# Altium PCB PCB.PcbDoc
Units mm, origin at the board's own origin, x right, y up, seen from the top; angles counter-clockwise.
Board outline 80 x 44.44 mm, 2 copper layers (Top Layer, Bottom Layer); 3 components, 28 nets, 117 pads, 0 vias.
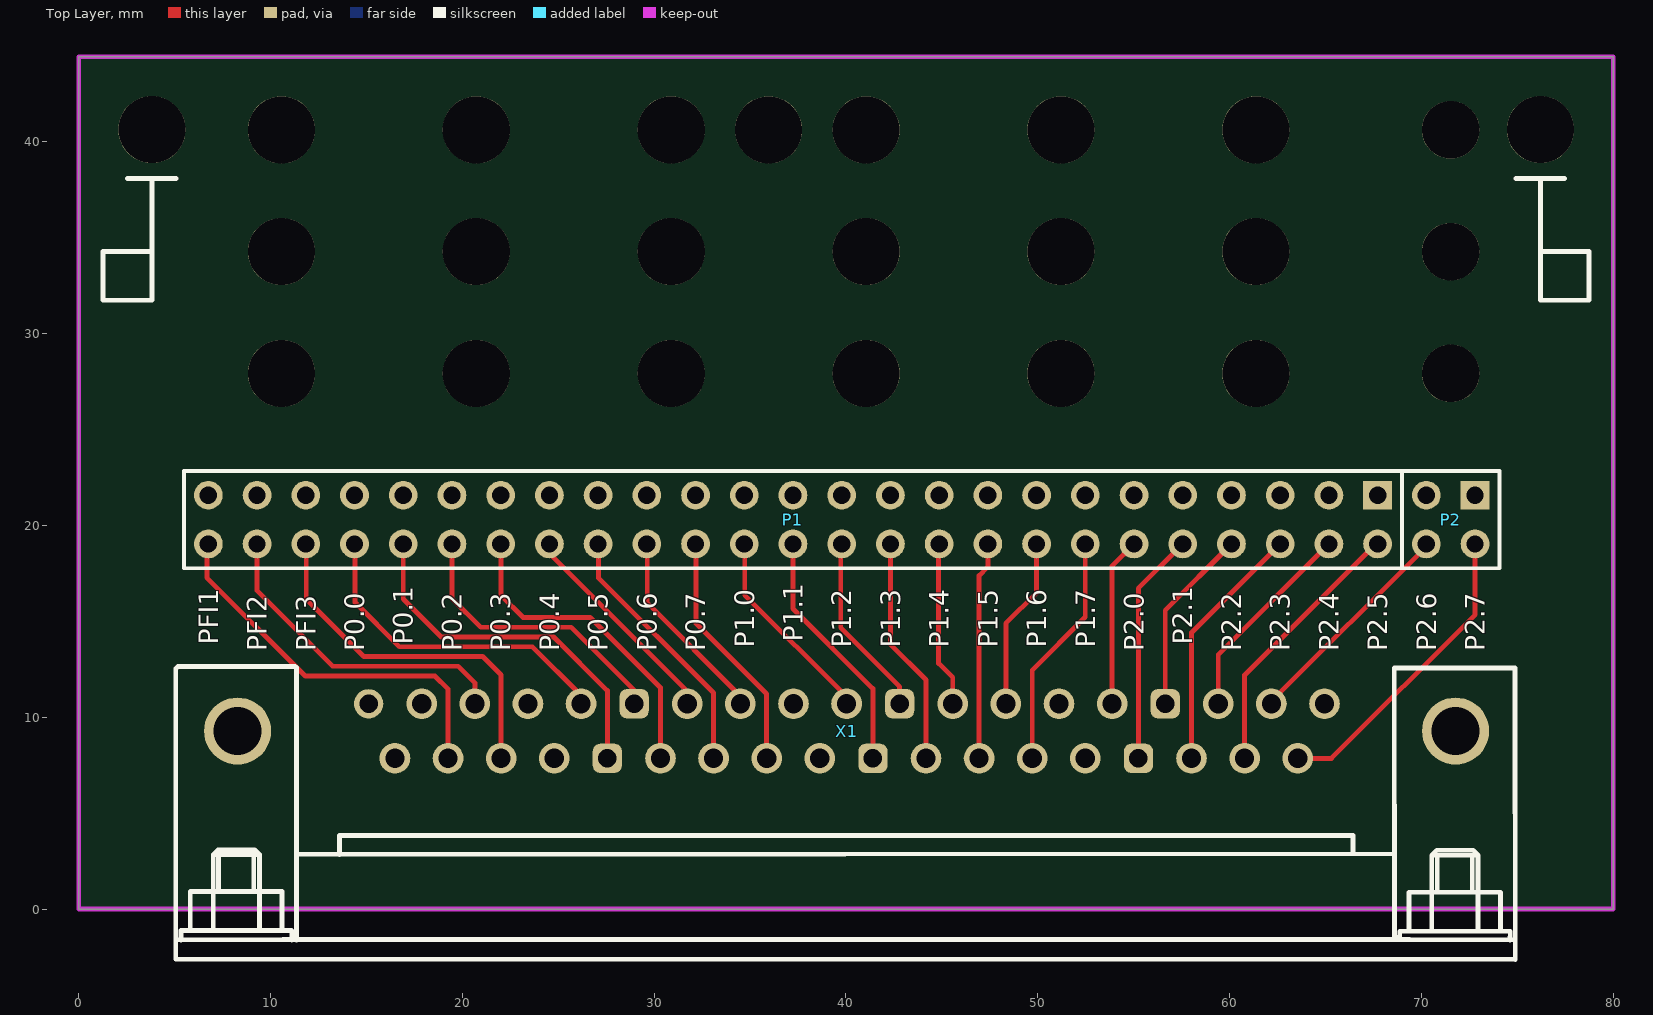
[diagram p0: Top Layer view]
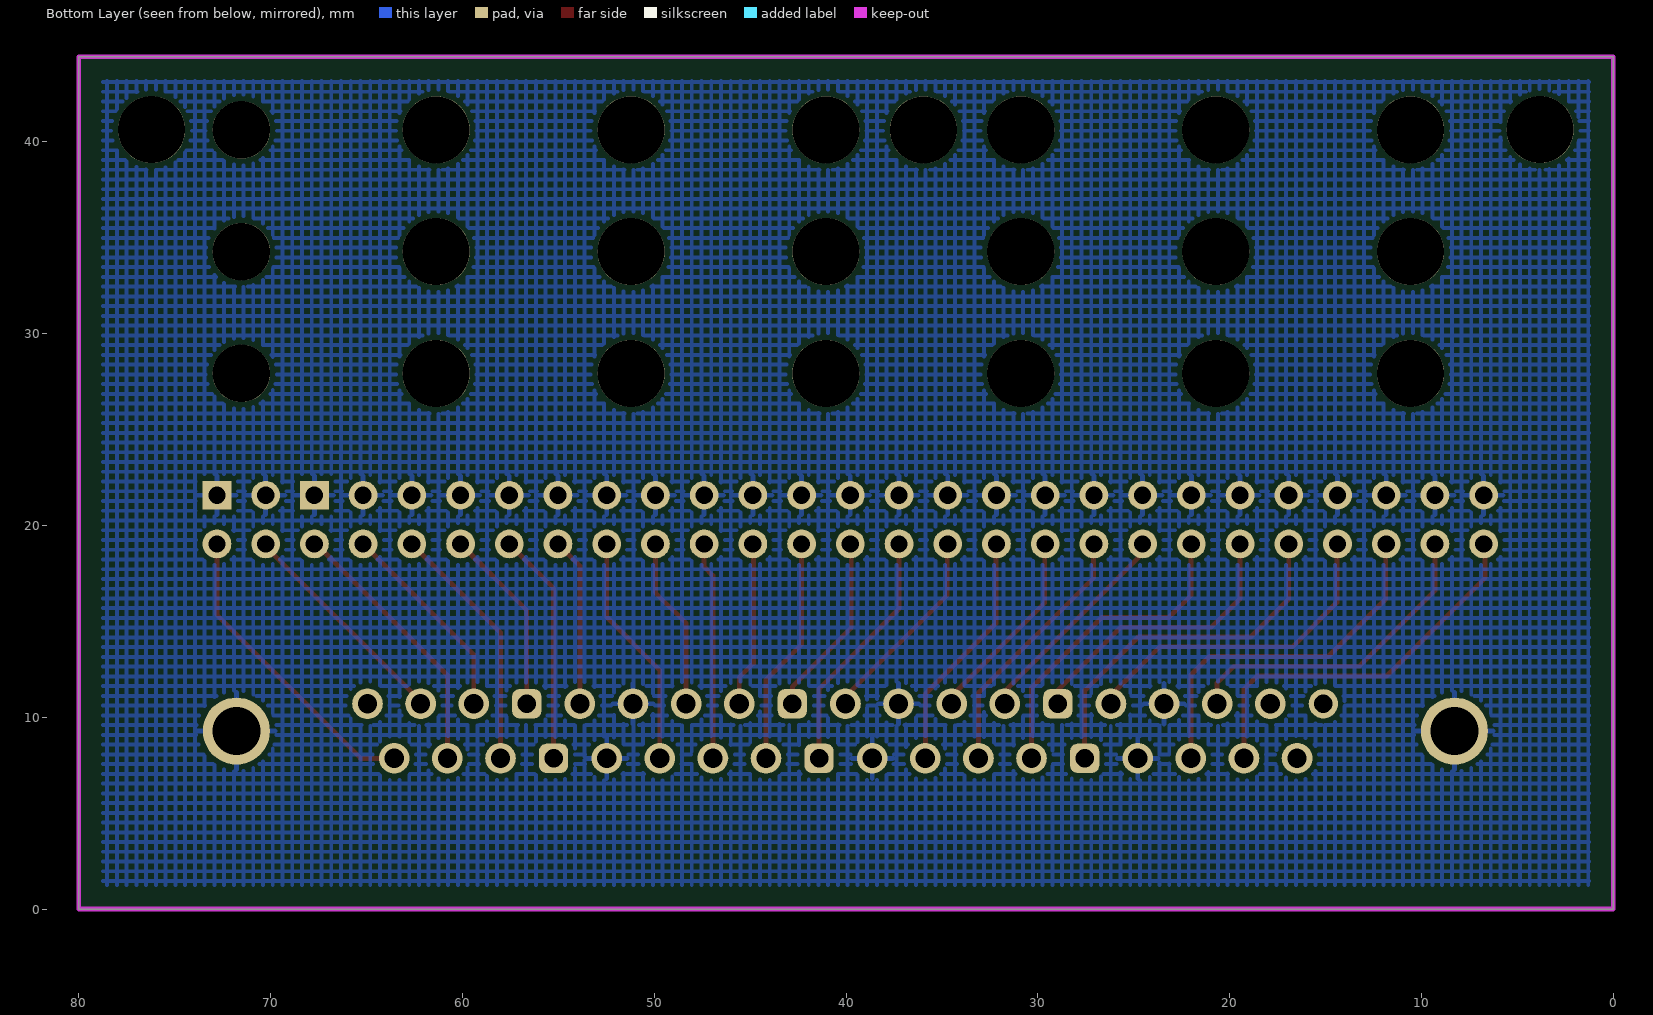
[diagram p1: Bottom Layer view, seen from below]

## Layer stack, top to bottom
Top Solder: solder mask 0.0102, Solder Resist, Dk 3.5
Top Layer: signal copper 0.0356
Dielectric 1: dielectric 0.32, FR-4, Dk 4.8
Bottom Layer: signal copper 0.0356
Bottom Solder: solder mask 0.0102, Solder Resist, Dk 3.5

## Board outline
0,0 80,0 80,44.441 0,44.441

## Design rules (kind name [scope] priority, off if disabled: settings)
Clearance [All] p1: gap=0.254
PolygonConnect [All] p1: connectstyle=Relief reliefconductorwidth=0.254 reliefentries=4 polygonreliefangle="90 Angle" airgapwidth=0.254
RoutingVias [All] p1: holewidth=0.711 width=1.27 viastyle="Through Hole" minholewidth=0.711 minwidth=1.27 maxholewidth=0.711 maxwidth=1.27
SolderMaskExpansion [All] p1: expansion=0.102
Width [All] p1: maxlimit=0.254 minlimit=0.254 preferedwidth=0.254
29 further rules are at their usual default settings.

## Components (designator, comment, footprint, x,y, rotation, side; value= is the part's Value field where it differs from the comment)
P1 "Header 25X2" HDR2X25 67.716,21.581 r180 top
P2 "Header 2X2" HDR2X2 72.796,21.581 r180 top
X1 "CHEAP_CON_37_FEMALE" CHEAP_CONN_FEMALE 71.78,9.287 r180 top

## Footprints (in the part's own frame and the unit in brackets; to place one, negate y for a bottom-side part, rotate by r counter-clockwise, add the part's x,y. Pads: shape width x height; smd on the part's side, far side on the other; paste and mask are expansions set on the pad)
CHEAP_CONN_FEMALE [mm] "CHEAP_CONN_FEMALE"
  round 1.6 hole 1: 1(6.833,-1.422) 2(9.601,-1.422) 3(12.37,-1.422) 5(17.907,-1.422) 6(20.676,-1.422) 7(23.444,-1.422) 8(26.213,-1.422) 10(31.75,-1.422) 11(34.519,-1.422) 12(37.287,-1.422) 13(40.056,-1.422) 15(45.593,-1.422) 16(48.362,-1.422) 17(51.13,-1.422) 18(53.899,-1.422) 20(8.23,1.422) 21(10.998,1.422) 22(13.767,1.422) 24(19.304,1.422) 25(22.073,1.422) 26(24.841,1.422) 27(27.61,1.422) 29(33.147,1.422) 30(35.916,1.422) 31(38.684,1.422) 32(41.453,1.422) 34(46.99,1.422) 35(49.759,1.422) 36(52.527,1.422) 37(55.296,1.422)
  rrect50% 1.524x1.524 hole 0.965: 4(15.138,-1.422) 9(28.981,-1.422) 14(42.824,-1.422) 23(16.535,1.422) 28(30.378,1.422) 33(44.221,1.422)
  round 1.524 hole 0.965: 19(56.667,-1.422)
  round 3.5 hole 2.5: 38(0,0) 39(63.5,0)
  silkscreen extent -3.11,-3.36 66.72,11.92
HDR2X2 [mm] "Connector; Header; 2x2 Position"
  rect 1.5x1.5 hole 0.9: 1(0,0)
  round 1.5 hole 0.9: 2(0,2.54) 3(2.54,0) 4(2.54,2.54)
  silkscreen extent -1.27,-1.27 3.81,3.81
HDR2X25 [mm] "Connector; Header; 25x2 Position"
  rect 1.5x1.5 hole 0.9: 1(0,0)
  round 1.5 hole 0.9: 2(0,2.54) 3(2.54,0) 4(2.54,2.54) 5(5.08,0) 6(5.08,2.54) 7(7.62,0) 8(7.62,2.54) 9(10.16,0) 10(10.16,2.54) 11(12.7,0) 12(12.7,2.54) 13(15.24,0) 14(15.24,2.54) 15(17.78,0) 16(17.78,2.54) 17(20.32,0) 18(20.32,2.54) 19(22.86,0) 20(22.86,2.54) 21(25.4,0) 22(25.4,2.54) 23(27.94,0) 24(27.94,2.54) 25(30.48,0) 26(30.48,2.54) 27(33.02,0) 28(33.02,2.54) 29(35.56,0) 30(35.56,2.54) 31(38.1,0) 32(38.1,2.54) 33(40.64,0) 34(40.64,2.54) 35(43.18,0) 36(43.18,2.54) 37(45.72,0) 38(45.72,2.54) 39(48.26,0) 40(48.26,2.54) 41(50.8,0) 42(50.8,2.54) 43(53.34,0) 44(53.34,2.54) 45(55.88,0) 46(55.88,2.54) 47(58.42,0) 48(58.42,2.54) 49(60.96,0) 50(60.96,2.54)
  silkscreen extent -1.27,-1.27 62.23,3.81

## Part data
P1: "Header, 25-Pin, Dual row"
P2: "Header, 2-Pin, Dual row"

## Free pads (board coordinates)
  round 3.5 hole 3.5 unplated: 2(3.81,40.64) 2(10.566,27.931) 2(10.566,34.281) 2(10.566,40.631) 2(20.726,27.931) 2(20.726,34.281) 2(20.726,40.631) 2(30.886,27.931) 2(30.886,34.281) 2(30.886,40.631) 2(35.966,40.631) 2(41.046,27.931) 2(41.046,34.281) 2(41.046,40.631) 2(51.206,27.931) 2(51.206,34.281) 2(51.206,40.631) 2(61.366,27.931) 2(61.366,34.281) 2(61.366,40.631) 2(76.2,40.64)
  round 3 hole 3 unplated: 2(71.526,27.931) 2(71.526,34.281) 2(71.526,40.631)

## Nets (pads, with @x,y where several pads share a name; then routed paths per layer and width w, separated by ;. In a path a pad name is that pad's centre, name@x,y a point inside that pad or via, vN(x,y) a via of type N, cw(c..) or ccw(c..) an arc to the next point about the centre after c; other vN are vias at no path point)
GND: P1.1 P1.3 P1.5 P1.7 P1.9 P1.11 P1.13 P1.15 P1.17 P1.19 P1.21 P1.23 P1.25 P1.27 P1.29 P1.31 P1.33 P1.35 P1.37 P1.39 P1.41 P1.43 P1.45 P1.47 P1.49 P2.1 P2.3 X1.6 X1.11 X1.16 X1.24 X1.29 X1.34 X1.38 X1.39
P0.0: P1.44 X1.15 | length 17.3
  Top Layer w0.254: P1.44@14.401,19.041 14.401,15.993 16.713,13.682 23.647,13.682 26.187,11.142 X1.15
P0.1: P1.42 X1.33 | length 19
  Top Layer w0.254: P1.42 16.916,16.171 18.897,14.19 24.765,14.19 27.559,11.396 X1.33
P0.2: P1.40 X1.14 | length 15
  Top Layer w0.254: P1.40 19.456,16.196 20.955,14.698 25.679,14.698 28.956,11.421 X1.14
P0.3: P1.38 X1.32 | length 16.7
  Top Layer w0.254: P1.38@22.021,19.041 22.021,16.349 23.164,15.206 26.67,15.206 30.327,11.548 X1.32
P0.4: P1.36 X1.13 | length 11.3
  Top Layer w0.254: P1.36 24.536,18.558 31.724,11.37 X1.13
P0.5: P1.34 X1.31 | length 13.7
  Top Layer w0.254: P1.34@27.101,19.041 27.101,17.263 33.096,11.269 X1.31
P0.6: P1.32 X1.12 | length 10.3
  Top Layer w0.254: P1.32@29.641,19.041 29.641,15.968 34.493,11.116 X1.12
P0.7: P1.30 X1.30 | length 12.7
  Top Layer w0.254: P1.30@32.181,19.041 32.181,14.901 35.864,11.218 X1.30
P1.0: P1.28 X1.10 | length 10.5
  Top Layer w0.254: P1.28@34.721,19.041 34.721,16.374 40.03,11.065 X1.10
P1.1: P1.26 X1.28 | length 12.9
  Top Layer w0.254: P1.26 37.236,15.663 41.402,11.497 X1.28
P1.2: P1.24 X1.9 | length 9.6
  Top Layer w0.254: P1.24@39.725,19.041 39.725,14.672 42.799,11.599 X1.9
P1.3: P1.22 X1.27 | length 11.9
  Top Layer w0.254: P1.22 42.316,13.809 44.17,11.954 X1.27
P1.4: P1.20 X1.8 | length 8.6
  Top Layer w0.254: P1.20@44.831,19.041 44.831,12.818 45.567,12.081 X1.8
P1.5: P1.18 X1.26 | length 11.4
  Top Layer w0.254: X1.26 46.939,17.39 47.396,17.847 P1.18
P1.6: P1.16 X1.7 | length 9
  Top Layer w0.254: X1.7 48.336,14.901 49.936,16.501 P1.16
P1.7: P1.14 X1.25 | length 12.3
  Top Layer w0.254: X1.25 49.707,12.462 52.476,15.231 P1.14
P2.0: P1.12 X1.5 | length 8.8
  Top Layer w0.254: X1.5 53.873,17.898 P1.12
P2.1: P1.10 X1.23 | length 12.1
  Top Layer w0.254: X1.23 55.245,16.73 P1.10
P2.2: P1.8 X1.4 | length 9.8
  Top Layer w0.254: X1.4 56.642,15.587 P1.8
P2.3: P1.6 X1.22 | length 13.1
  Top Layer w0.254: X1.22 58.013,14.418 P1.6
P2.4: P1.4 X1.3 | length 10.7
  Top Layer w0.254: X1.3 59.41,13.275 P1.4
P2.5: P1.2 X1.21 | length 14.1
  Top Layer w0.254: X1.21 60.782,12.208 P1.2@67.665,19.092
P2.6: P2.4 X1.2 | length 11.6
  Top Layer w0.254: X1.2 62.179,10.837 P2.4@70.319,18.977
P2.7: P2.2 X1.20 | length 16
  Top Layer w0.254: X1.20 65.303,7.865 72.796,15.358 P2.2
PFI1: P1.50 X1.36 | length 20.3
  Top Layer w0.254: P1.50@6.68,18.965 6.68,17.288 11.811,12.158 18.567,12.158 19.253,11.472 X1.36
PFI2: P1.48 X1.17 | length 16.9
  Top Layer w0.254: P1.48 9.296,16.603 13.233,12.666 19.786,12.666 20.65,11.802 X1.17
PFI3: P1.46 X1.35 | length 19
  Top Layer w0.254: P1.46@11.861,19.041 11.861,16.171 14.859,13.174 21.056,13.174 22.021,12.208 X1.35
pads on no net: X1.1 X1.18 X1.19 X1.37

## Polygon pours and split planes (outlines as drawn)
GND on Bottom Layer "Top Overlay-No Net" (hatched 90Degree grid 0.508 track 0.203, remove dead copper, pour order 3): 1.27,43.18 1.27,1.27 78.74,1.27 78.74,43.18

## Keep-outs
Keep-Out Layer:
  the board outline again, w0.254

## Silkscreen, mask and mechanical layers (free items; w line width, h text height)
Top Overlay:
  lines w0.254: 2.54,38.1 5.08,38.1 ; 3.81,38.1 3.81,31.75 ; 74.93,38.1 77.47,38.1 ; 76.2,34.29 78.74,34.29 78.74,31.75 76.2,31.75 76.2,38.1 ; 3.81,31.75 1.27,31.75 1.27,34.29 3.81,34.29 3.81,31.75
  text "P1.1" at 37.744,13.953 h1 r90
  text "PFI1" at 7.264,13.786 h1 r90
  text "P0.1" at 17.424,13.786 h1 r90
  text "P2.1" at 58.064,13.786 h1 r90
  text "P1.0" at 35.204,13.62 h1 r90
  text "P1.2" at 40.284,13.62 h1 r90
  text "P1.3" at 42.824,13.62 h1 r90
  text "P1.4" at 45.364,13.62 h1 r90
  text "P1.5" at 47.904,13.62 h1 r90
  text "P1.6" at 50.444,13.62 h1 r90
  text "P1.7" at 52.984,13.62 h1 r90
  text "PFI2" at 9.804,13.453 h1 r90
  text "PFI3" at 12.344,13.453 h1 r90
  text "P0.0" at 14.884,13.453 h1 r90
  text "P0.2" at 19.964,13.453 h1 r90
  text "P0.3" at 22.504,13.453 h1 r90
  text "P0.4" at 25.044,13.453 h1 r90
  text "P0.5" at 27.584,13.453 h1 r90
  text "P0.6" at 30.124,13.453 h1 r90
  text "P0.7" at 32.664,13.453 h1 r90
  text "P2.0" at 55.524,13.453 h1 r90
  text "P2.2" at 60.604,13.453 h1 r90
  text "P2.3" at 63.144,13.453 h1 r90
  text "P2.4" at 65.684,13.453 h1 r90
  text "P2.5" at 68.224,13.453 h1 r90
  text "P2.6" at 70.764,13.453 h1 r90
  text "P2.7" at 73.304,13.453 h1 r90